# EAGLE board Trabajo TEC (EAGLE 9.7.0)

Size 100 x 80 mm. Coordinates in mm from the lower left corner, seen from the top.
Outline: 0,0 100,0 100,80 0,80 0,0
Copper layers (1*16): Top 0.035mm / dielectric 1.5mm / Bottom 0.035mm
Design rules "default": minimum track width 6mil, minimum drill 0.35mm, track to track 6mil, track to pad 6mil, pad to pad 6mil, via to via 6mil, smd to smd 6mil, copper to edge 40mil, drill to drill 6mil, minimum pad ring 10mil, minimum via ring 8mil, stop-mask expansion 4mil, vias tented up to drill 0mil, thermal gap 10mil

## Footprints (pad centres in the part's own frame; a part is rotated, then mirrored left to right if it is on the bottom)
DIODE-AXIAL = drill 1: 1 -5.08,0; 2 5.08,0
LU-5-R = drill 0.8: 1 -6.35,-3.81; 5 3.81,-3.81; 6 6.35,-3.81; 7 6.35,3.81; 8 3.81,3.81; 12 -6.35,3.81
1X02 = drill 1.016 long: 1 -1.27,0; 2 1.27,0
BATTERY-GENERIC = drill 1.118 pad 3.15 octagon: + 2.54,0; - -2.54,0
GL5528 = drill 0.8 pad 1.4: 1 -1.702,0; 2 1.702,0
RESAD1016W63L850D250B = drill 0.83 pad 1.43: 1 -5.08,0; 2 5.08,0
TO92 = drill 0.813 octagon: 1 -1.27,0; 2 0,1.905; 3 1.27,0
ARDUINO-UNO-R3-SHIELD = drill 1.016 pad 1.88: 3.3V 24.13,-2.54; 5V 24.13,0; A0 24.13,12.7; A1 24.13,15.24; A2 24.13,17.78; A3 24.13,20.32; A4 24.13,22.86; A5 24.13,25.4; AREF -24.13,-13.97; D2 -24.13,20.32; D3 -24.13,17.78; D4 -24.13,15.24; D5 -24.13,12.7; D6 -24.13,10.16; D7 -24.13,7.62; D8 -24.13,3.81; D9 -24.13,1.27; D10 -24.13,-1.27; D11 -24.13,-3.81; D12 -24.13,-6.35; D13 -24.13,-8.89; GND@0 24.13,2.54; GND@1 24.13,5.08; GND@2 -24.13,-11.43; IOREF 24.13,-7.62; NC 24.13,-10.16; RES 24.13,-5.08; RX -24.13,25.4; SCL -24.13,-19.05; SDA -24.13,-16.51; TX -24.13,22.86; VIN 24.13,7.62

## Placement (x,y rotation side)
DDIODO  DIODEDIODE-AXIAL  [DIODE-AXIAL]  112.69,82.25 270 top  (outside the outline)
KRELE  RELAY-SPDT_LU-5-R  [LU-5-R]  131.78,82.68 180 top  (outside the outline)
LBOMBILLA  LIGHTBULB  [1X02]  150.46,23.25 0 top  (outside the outline)
PFUENTE  BATTERYGENERIC  [BATTERY-GENERIC]  171.01,115.39 180 top  (outside the outline)
RLDR  PHOTOCELL_GL5528  [GL5528]  111.82,5.58 270 top  (outside the outline)
RRESISTANCE  1k  [RESAD1016W63L850D250B]  128.21,107.33 0 top  (outside the outline)
RRESISTENCIA  1k  [RESAD1016W63L850D250B]  109.68,18.91 270 top  (outside the outline)
TTRANSISTOR  NPN  [TO92]  115.02,107.3 90 top  (outside the outline)
UARDUINO  ARDUINO-UNO-R3-SHIELD  [ARDUINO-UNO-R3-SHIELD]  47.88,64.83 270 top

## Library data of the parts
DDIODO KRELE LBOMBILLA PFUENTE RLDR RRESISTANCE RRESISTENCIA UARDUINO = Tinkercad
TTRANSISTOR = Tinkercad; CATEGORY: Transistor; SUB-CATEGORY: BJT; TYPE: NPN

## Nets
LBOMBILLA_1: KRELE.6 LBOMBILLA.1
PFUENTE+: KRELE.12 PFUENTE.+
PFUENTE-: LBOMBILLA.2 PFUENTE.-
TTRANSISTOR_B: RRESISTANCE.1 TTRANSISTOR.2
TTRANSISTOR_C: DDIODO.1 KRELE.5 TTRANSISTOR.1
UARDUINO_5V: DDIODO.2 KRELE.8 RRESISTENCIA.1 UARDUINO.5V
UARDUINO_A0: RLDR.1 RRESISTENCIA.2 UARDUINO.A0
UARDUINO_D8: RRESISTANCE.2 UARDUINO.D8
UARDUINO_GND: RLDR.2 TTRANSISTOR.3 UARDUINO.GND@0 UARDUINO.GND@1 UARDUINO.GND@2

## Tracks (layer width: path | path; a pad name or v marks a point on that pad's centre or on a via)
LBOMBILLA_1  (1 unrouted)
PFUENTE+  (1 unrouted)
PFUENTE-  (1 unrouted)
TTRANSISTOR_B  (1 unrouted)
TTRANSISTOR_C  (2 unrouted)
UARDUINO_5V  (3 unrouted)
UARDUINO_A0  (2 unrouted)
UARDUINO_D8  (1 unrouted)
UARDUINO_GND  (4 unrouted)